# Allegro board JTAG_TO_DC3-10P_V10_220511.brd
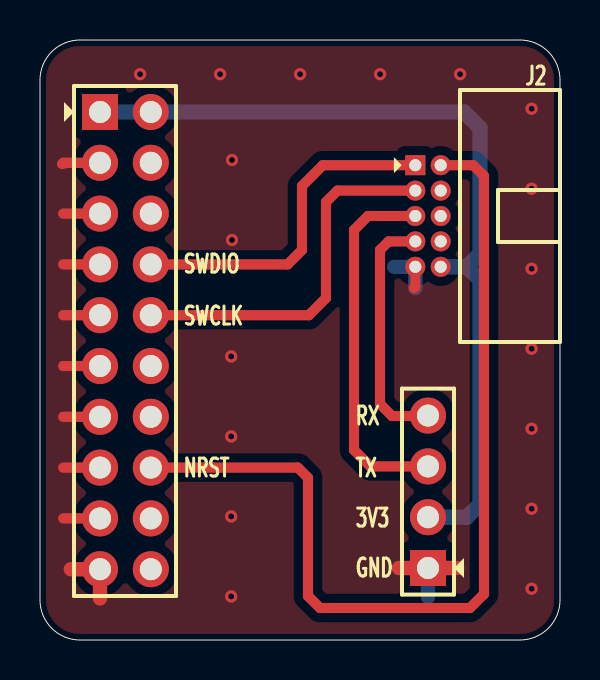
[diagram p0: board, top side]
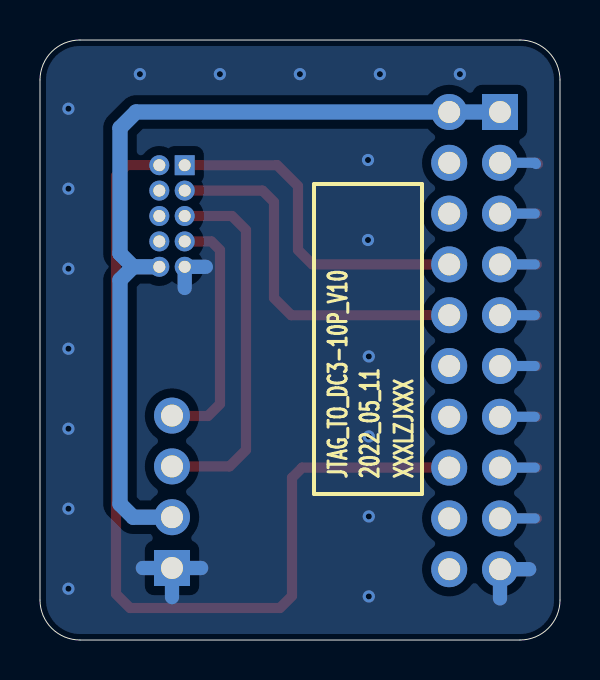
[diagram p1: board, bottom side, seen from below]

Outline 26 x 30 mm; copper layers: TOP, BOTTOM. Coordinates in mm from the lower left corner of the outline.
Outline path: 0,28 arc(0.59,29.41) 2,30 24,30 arc(25.41,29.41) 26,28 26,2 arc(25.41,0.59) 24,0 2,0 arc(0.59,0.59) 0,2 0,28

## Design rules (mm)
constraint set DEFAULT: min track width 0.203, pair gap 0.203

## Placement (name value [footprint] x y rotation side)
J1  A2541HWR-2x10P  [CN2X10-2P54-Z]  3 26.4 270 top
J2  -  [DC3-10P-Z-L]  19.4 21.2 90 top
J3  -  [CN1X4-2P54-Z]  19.4 3.6 90 top
NOREF  -  []  0 0 90 top
NOREF#2  -  []  0 0 0 top

## Library data of the parts
J1 = CON20_0
J2 = DC3-10P-Z-L
J3 = CONN RCPT 4

## Footprints (pads in the part's own frame, mm; a bottom-side part is the same pattern mirrored in y, then rotated)
CN1X4-2P54-Z
  rect 1.8x1.8 hole 1.1: 1(0,0)
  round 1.8 hole 1.1: 2(2.54,0) 3(5.08,0) 4(7.62,0)
CN2X10-2P54-Z
  rect 1.8x1.8 hole 1.1: 1(0,0)
  round 1.8 hole 1.1: 2(0,2.54) 3(2.54,0) 4(2.54,2.54) 5(5.08,0) 6(5.08,2.54) 7(7.62,0) 8(7.62,2.54) 9(10.16,0) 10(10.16,2.54) 11(12.7,0) 12(12.7,2.54) 13(15.24,0) 14(15.24,2.54) 15(17.78,0) 16(17.78,2.54) 17(20.32,0) 18(20.32,2.54) 19(22.86,0) 20(22.86,2.54)
DC3-10P-Z-L
  rect 1x1 hole 0.6: 1(2.54,0.635)
  round 1 hole 0.6: 2(2.54,-0.635) 3(1.27,0.635) 4(1.27,-0.635) 5(0,0.635) 6(0,-0.635) 7(-1.27,0.635) 8(-1.27,-0.635) 9(-2.54,0.635) 10(-2.54,-0.635)

## Nets
GND: J1.3 J1.5 J1.7 J1.9 J1.11 J1.13 J1.15 J1.17 J1.19 J2.9 J3.1
VCC_3.3V: J1.1 J1.2 J2.10 J3.2
NRST: J1.16 J2.2
SWCLK: J1.10 J2.3
SWDIO: J1.8 J2.1
T_VCP_RX: J2.7 J3.4
T_VCP_TX: J2.5 J3.3

Pads without a net: J1 4 6 12 14 18 20; J2 4 6 8

## Via types
v1: diameter 0.61, hole 0.305, TOP to BOTTOM, 18 vias

## Routing (per net, layer and track width the routed paths; a pad name or vN(x,y) marks a point on that pad's centre or on a via; arc(x,y) is an arc through that point)
GND: length 45.1
  TOP w0.508: J1.9 1.16,16.24 ; J1.3 1.16,23.86 1.1,23.8 ; J1.17 1.16,6.08 ; 18.7,17.6 18.77,17.66 J2.9 ; J1.13 1.16,11.16 ; J1.11 1.16,13.7 ; J1.7 1.16,18.78 ; J1.15 1.16,8.62 ; J1.5 1.16,21.32
  TOP w0.711: 1.54,3.54 J1.19 3,2.08 ; 17.94,3.6 J3.1 20.86,3.6
  BOTTOM w0.508: J1.11 1.26,13.7 ; J1.3 1.26,23.86 1.2,23.8 ; J1.9 1.26,16.24 ; J1.15 1.26,8.62 ; J1.7 1.26,18.78 ; J1.5 1.26,21.32 ; J1.13 1.26,11.16 ; J1.17 1.26,6.08
  BOTTOM w0.711: 1.54,3.54 J1.19 3,2.08 ; 17.94,3.6 J3.1 ; J3.1 19.4,2.14 ; J3.1 20.86,3.6 ; 18.77,17.6 J2.9 17.71,18.66
  vias: v1(5.01,28.29) v1(9.01,28.29) v1(9.6,24) v1(9.6,20) v1(9.56,14.18) v1(9.56,10.18) v1(9.56,6.18) v1(9.56,2.18) v1(13.01,28.29) v1(17.01,28.29) v1(21.01,28.29) v1(24.58,26.56) v1(24.58,22.56) v1(24.58,18.56) v1(24.58,14.56) v1(24.58,10.56) v1(24.58,6.56) v1(24.58,2.56)
VCC_3.3V: length 42.9
  BOTTOM w0.762: J1.1 J1.2 21.2,26.4 22,25.6 22,19.32 21.34,18.66 ; 21.34,18.66 22,18 22,6.8 21.34,6.14 J3.2 ; 21.34,18.66 J2.10
NRST: length 46.6
  TOP w0.508: J1.16 12.89,8.62 13.4,8.11 13.4,2.2 14,1.6 21.5,1.6 22.2,2.3 22.2,23.2 21.66,23.74 J2.2
SWCLK: length 18.6
  TOP w0.508: J2.3 14.87,22.47 14.3,21.9 14.3,17.1 13.44,16.24 J1.10
SWDIO: length 17.2
  TOP w0.508: J1.8 12.38,18.78 13.1,19.5 13.1,22.7 14.14,23.74 J2.1
T_VCP_RX: length 12.3
  TOP w0.508: J3.4 19.38,11.2 17.6,11.2 17,11.8 17,19.5 17.43,19.93 J2.7
T_VCP_TX: length 18.4
  TOP w0.508: J3.3 16.52,8.68 15.7,9.5 15.7,20.5 16.4,21.2 J2.5

## Copper pours and planes (outline as drawn; the poured copper is in the pictures)
GND on TOP: 25.7,2 25.2,0.8 24,0.3 2,0.3 0.8,0.8 0.3,2 0.3,28 0.8,29.2 2,29.7 24,29.7 25.2,29.2 25.7,28 ; 11 cut-outs
GND on BOTTOM: 25.7,2 25.2,0.8 24,0.3 2,0.3 0.8,0.8 0.3,2 0.3,28 0.8,29.2 2,29.7 24,29.7 25.2,29.2 25.7,28 ; 9 cut-outs

## Text on the board
Ref Des/Silkscreen Bottom: XXXLZJXXX | 2022_05_11 | JTAG_TO_DC3-10P_V10
Ref Des/Silkscreen Top: SWDIO | SWCLK | NRST | RX | TX | 3V3 | GND
DEVICE_TYPE_TOP: FIGURE | FINISHED_SIZE | 0.3048 | 0.6 | 1.1 | DRILL CHART: TOP to BOTTOM | ALL UNITS ARE IN MILLIMETERS | PLATED | QTY | 18 | 10 | 24 | 52 | TOTAL HOLES:
